# EAGLE board r0.2.6 (EAGLE 7.2.0)
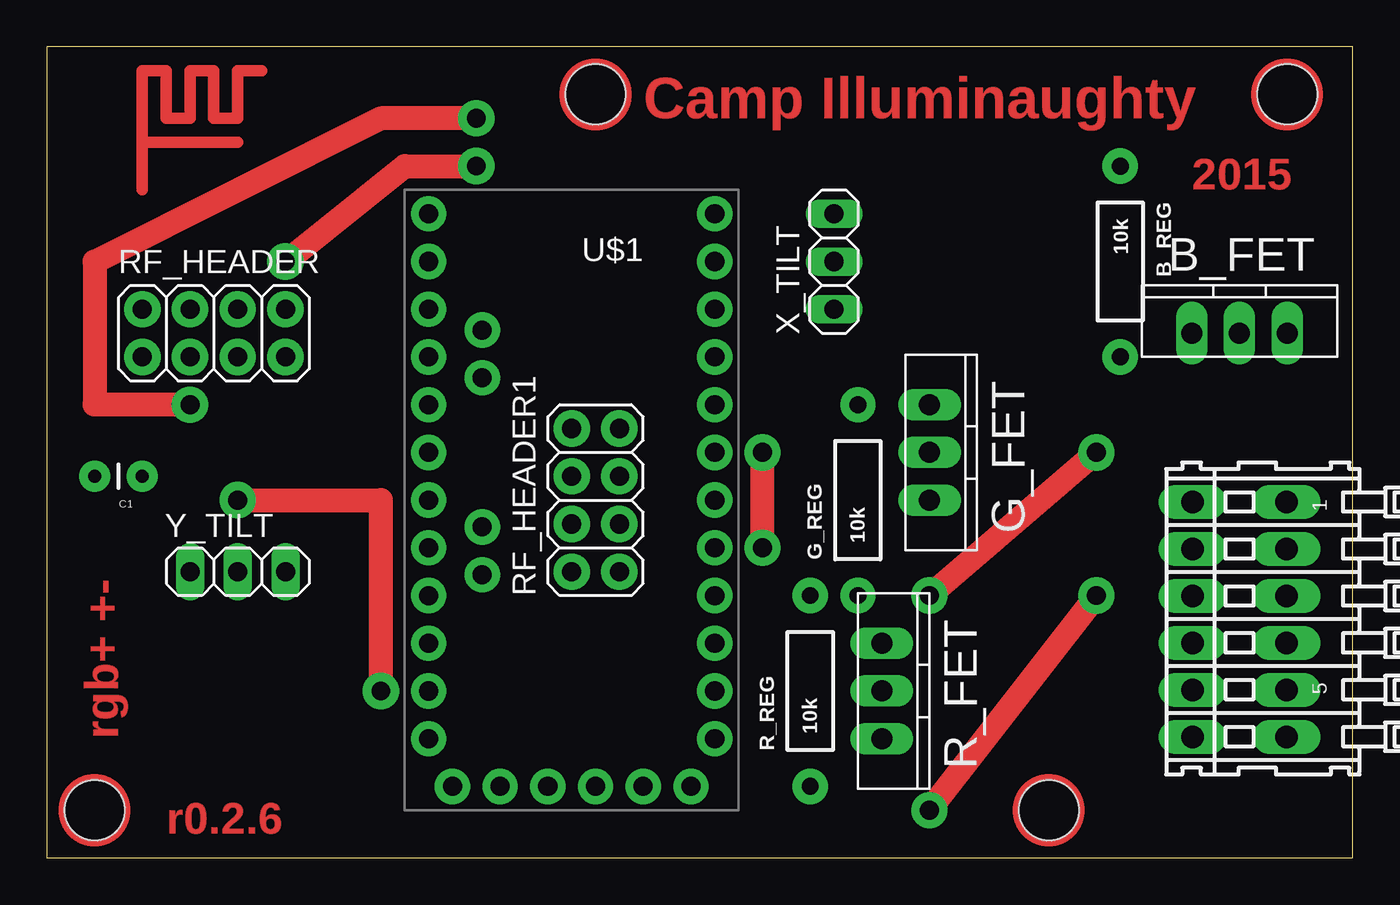
[diagram p0: board, top side]
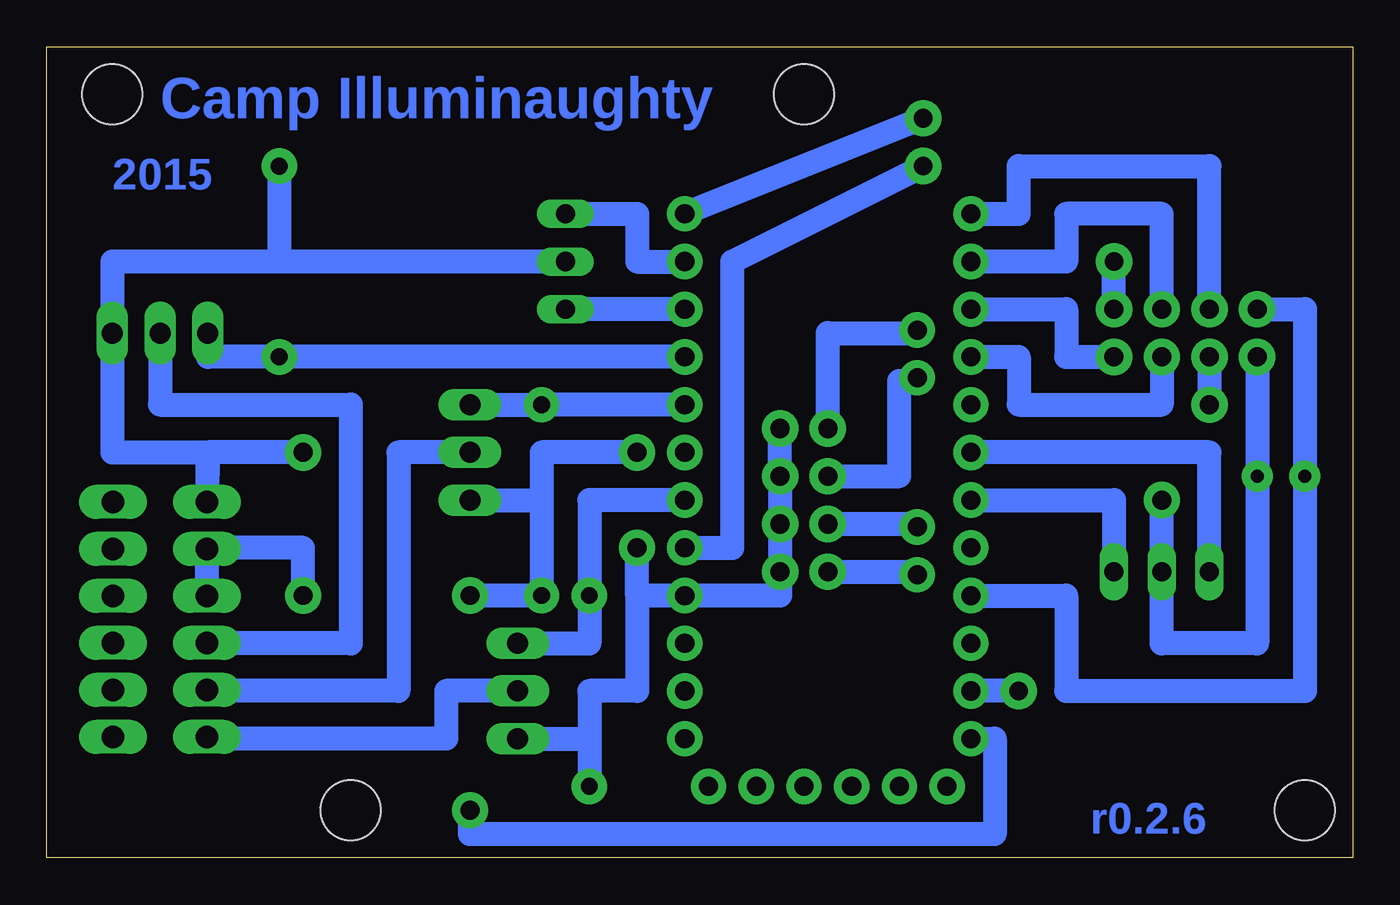
[diagram p1: board, bottom side, seen from below]

Size 69.52 x 43.17 mm. Coordinates in mm from the lower left corner, seen from the top.
Outline: 0,0 69.52,0 69.52,43.17 0,43.17 0,0
Copper layers (1*16): Top 0.035mm / dielectric 1.5mm / Bottom 0.035mm
Design rules "default": minimum track width 10mil, minimum drill 24mil, track to track 8mil, track to pad 8mil, pad to pad 8mil, via to via 8mil, smd to smd 8mil, copper to edge 40mil, drill to drill 8mil, minimum pad ring 10mil, minimum via ring 8mil, stop-mask expansion 4mil, vias tented up to drill 0mil, thermal gap 10mil
Holes 3.2 mm at 29.21,40.64 2.54,2.54 66.04,40.64 53.34,2.54

## Footprints (pad centres in the part's own frame; a part is rotated, then mirrored left to right if it is on the bottom)
234-206 = drill 1.2 long: A1 -6.25,2.5; A2 -3.75,2.5; A3 -1.25,2.5; A4 1.25,2.5; A5 3.75,2.5; A6 6.25,2.5; B1 -6.25,-2.5; B2 -3.75,-2.5; B3 -1.25,-2.5; B4 1.25,-2.5; B5 3.75,-2.5; B6 6.25,-2.5
TO220 = drill 1.118 long: 1 -2.54,-2.54; 2 0,-2.54; 3 2.54,-2.54
AXIAL-0.4 = drill 0.9 pad 1.88: P$1 -5.08,0; P$2 5.08,0
CAP-PTH-SMALL = drill 0.7 pad 1.651: 1 0,0; 2 2.54,0
2X04 = drill 1.016 pad 1.93: 1 -3.81,-1.27; 2 -3.81,1.27; 3 -1.27,-1.27; 4 -1.27,1.27; 5 1.27,-1.27; 6 1.27,1.27; 7 3.81,-1.27; 8 3.81,1.27
ARDUINO_PRO_MINI = drill 1.016 pad 1.88: 1 -7.62,12.7; 2 -7.62,10.16; 3 -7.62,7.62; 4 -7.62,5.08; 5 -7.62,2.54; 6 -7.62,0; 7 -7.62,-2.54; 8 -7.62,-5.08; 9 -7.62,-7.62; 10 -7.62,-10.16; 11 -7.62,-12.7; 12 -7.62,-15.24; 13 7.62,-15.24; 14 7.62,-12.7; 15 7.62,-10.16; 16 7.62,-7.62; 17 7.62,-5.08; 18 7.62,-2.54; 19 7.62,0; 20 7.62,2.54; 21 7.62,5.08; 22 7.62,7.62; 23 7.62,10.16; 24 7.62,12.7; A4 4.763,1.429; A5 4.763,3.969; A6 4.763,-9.049; A7 4.763,-6.509; BLK -6.35,15.24; GND -3.81,15.24; GRN 6.35,15.24; RXI 1.27,15.24; TXO 3.81,15.24; VCC -1.27,15.24
1X03 = drill 1.016 long: 1 -2.54,0; 2 0,0; 3 2.54,0

## Placement (x,y rotation side)
12VDC_AND_LED  value?  [234-206]  63.5,12.7 270 top
B_FET  BUZ20  [TO220]  63.5,30.48 0 top
B_REG  10k  [AXIAL-0.4]  57.15,31.75 270 top
C1  10u  [CAP-PTH-SMALL]  5.08,20.32 180 top
G_FET  BUZ20  [TO220]  49.53,21.59 270 top
G_REG  10k  [AXIAL-0.4]  43.18,19.05 90 top
R_FET  BUZ20  [TO220]  46.99,8.89 270 top
R_REG  10k  [AXIAL-0.4]  40.64,8.89 90 top
RF_HEADER  value?  [2X04]  8.89,27.94 0 top
RF_HEADER1  value?  [2X04]  29.21,19.05 90 top
U$1  ARDUINO_PRO_MINI  [ARDUINO_PRO_MINI]  27.94,19.05 180 top
X_TILT  value?  [1X03]  41.91,31.75 90 top
Y_TILT  value?  [1X03]  10.16,15.24 0 top

## Library data of the parts
12VDC_AND_LED = con-wago; MPN: 234-206; OC_FARNELL: unknown; OC_NEWARK: 28K9095
B_FET G_FET R_FET = MyMosfet
B_REG C1 G_REG R_REG = SparkFun-Passives
RF_HEADER RF_HEADER1 = rf-header
U$1 = SparkFun-Boards
X_TILT Y_TILT = pinhead

## Nets
N$1: U$1.10 X_TILT.1
N$2: B_FET.1 B_REG.P$2 U$1.9
N$3: R_FET.1 R_REG.P$2 U$1.6
N$4: 12VDC_AND_LED.B5 G_FET.2
N$5: 12VDC_AND_LED.B4 B_FET.2
N$6: U$1.11 X_TILT.3
N$7: 12VDC_AND_LED.B6 R_FET.2
N$9: 12VDC_AND_LED.B2 12VDC_AND_LED.B3 U$1.24
N$10: C1.1 RF_HEADER.1 U$1.23 Y_TILT.2
N$11: 12VDC_AND_LED.B1 B_FET.3 B_REG.P$1 G_FET.3 G_REG.P$1 R_FET.3 R_REG.P$1 RF_HEADER1.1 RF_HEADER1.3 RF_HEADER1.5 RF_HEADER1.7 U$1.4 X_TILT.2
N$12: RF_HEADER1.4 U$1.A4
N$13: G_FET.1 G_REG.P$2 U$1.8
N$14: U$1.19 Y_TILT.3
N$15: RF_HEADER.3 U$1.12
N$16: RF_HEADER.4 U$1.13
N$17: RF_HEADER.6 U$1.14
N$18: RF_HEADER1.2 U$1.A5
N$19: RF_HEADER1.8 U$1.A6
N$20: RF_HEADER1.6 U$1.A7
N$21: RF_HEADER.7 U$1.15
N$23: RF_HEADER.5 U$1.16
N$25: RF_HEADER.8 U$1.5
N$27: U$1.18 Y_TILT.1
Y_TILT: C1.2 RF_HEADER.2 U$1.21

## Tracks (layer width: path | path; a pad name or v marks a point on that pad's centre or on a via)
N$1
  Bottom 1.27: U$1.10 X_TILT.1
N$2
  Bottom 1.27: U$1.9 B_REG.P$2 60.96,26.67 B_FET.1
N$3
  Bottom 1.27: U$1.6 40.64,19.05 R_REG.P$2 40.64,11.43 R_FET.1
N$4
  Bottom 1.27: 12VDC_AND_LED.B5 61,8.89 50.8,8.89 50.8,21.59 G_FET.2
N$5
  Bottom 1.27: 12VDC_AND_LED.B4 61,11.43 53.34,11.43 53.34,24.13 63.5,24.13 B_FET.2
N$6
  Bottom 1.27: X_TILT.3 38.1,34.29 38.1,31.75 U$1.11
N$7
  Bottom 1.27: 12VDC_AND_LED.B6 61,6.35 48.26,6.35 48.26,8.89 R_FET.2
N$8
  Top 0.61: 5.08,38.1 5.08,41.91 6.35,41.91 6.35,39.37 7.62,39.37 7.62,41.91 8.89,41.91 8.89,39.37 10.16,39.37 10.16,41.91 11.43,41.91 | 5.08,35.56 5.08,38.1 | 5.08,38.1 10.16,38.1
N$9  (via drill 1 pad 1.93)
  Top 1.27: v46.99,2.54 v55.88,13.97
  Bottom 1.27: U$1.24 19.05,6.35 19.05,1.27 46.99,1.27 v46.99,2.54 | v55.88,13.97 55.88,16.51 61,16.51 12VDC_AND_LED.B2 12VDC_AND_LED.B3
N$10  (via drill 1 pad 1.93)
  Top 1.27: v10.16,19.05 17.78,19.05 v17.78,8.89
  Bottom 1.27: RF_HEADER.1 C1.1 5.08,11.43 10.16,11.43 Y_TILT.2 v10.16,19.05 | v17.78,8.89 U$1.23
N$11  (via drill 1 pad 1.93)
  Top 1.27: v38.1,16.51 v38.1,21.59 | v46.99,13.97 v55.88,21.59
  Bottom 1.27: RF_HEADER1.7 RF_HEADER1.5 RF_HEADER1.3 RF_HEADER1.1 30.48,13.97 U$1.4 38.1,13.97 | 38.1,13.97 38.1,8.89 40.64,8.89 40.64,6.35 | 40.64,6.35 R_REG.P$1 | B_REG.P$1 57.15,31.75 | 57.15,31.75 66.04,31.75 B_FET.3 66.04,21.59 61,21.59 61,19.05 | X_TILT.2 57.15,31.75 | 38.1,13.97 v38.1,16.51 | v38.1,21.59 43.18,21.59 43.18,19.05 | 43.18,19.05 G_REG.P$1 v46.99,13.97 | v55.88,21.59 60.96,21.59 61,19.05 | 61,19.05 12VDC_AND_LED.B1 | R_FET.3 40.64,6.35 | G_FET.3 43.18,19.05
N$12
  Bottom 1.27: RF_HEADER1.4 23.34,17.78 U$1.A4
N$13
  Bottom 1.27: U$1.8 G_REG.P$2 G_FET.1
N$14
  Bottom 1.27: U$1.19 12.7,19.05 Y_TILT.3
N$15  (via drill 1 pad 1.93)
  Top 1.27: v7.62,24.13 2.54,24.13 2.54,31.75 17.78,39.37 v22.86,39.37
  Bottom 1.27: RF_HEADER.3 v7.62,24.13 | v22.86,39.37 U$1.12
N$16
  Bottom 1.27: U$1.13 17.78,34.29 17.78,36.83 7.62,36.83 RF_HEADER.4
N$17
  Bottom 1.27: U$1.14 15.24,31.75 15.24,34.29 10.16,34.29 RF_HEADER.6
N$18
  Bottom 1.27: RF_HEADER1.2 23.34,15.24 U$1.A5
N$19
  Bottom 1.27: RF_HEADER1.8 27.94,27.94 23.34,27.94 U$1.A6
N$20
  Bottom 1.27: RF_HEADER1.6 24.13,20.32 24.13,25.4 23.34,25.4 U$1.A7
N$21
  Bottom 1.27: U$1.15 15.24,29.21 15.24,26.67 RF_HEADER.7
N$23
  Bottom 1.27: U$1.16 17.78,26.67 17.78,24.13 10.16,24.13 RF_HEADER.5
N$25  (via drill 1 pad 1.93)
  Top 1.27: v12.7,31.75 19.05,36.83 v22.86,36.83
  Bottom 1.27: RF_HEADER.8 v12.7,31.75 | U$1.5 33.02,16.51 33.02,31.75 v22.86,36.83
N$27
  Bottom 1.27: Y_TILT.1 7.62,21.59 U$1.18
Y_TILT
  Bottom 1.27: U$1.21 15.24,13.97 15.24,8.89 2.54,8.89 C1.2 2.54,29.21 RF_HEADER.2
(copper drawn outside any net)
  shapes: Top circle x4

## Text on the board
Top: Camp Illuminaughty | 2015 | rgb+ +- | r0.2.6
Bottom: Camp Illuminaughty | 2015 | r0.2.6